# EAGLE board untitled (EAGLE 6.1)
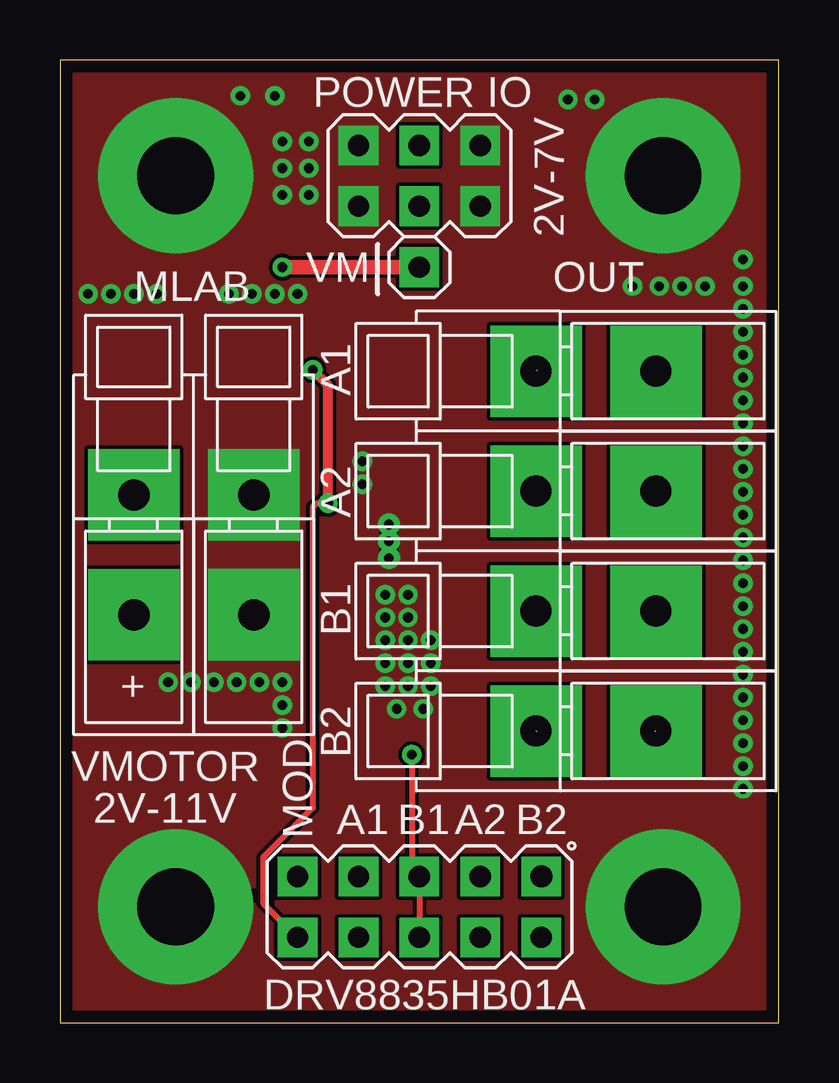
[diagram p0: board, top side]
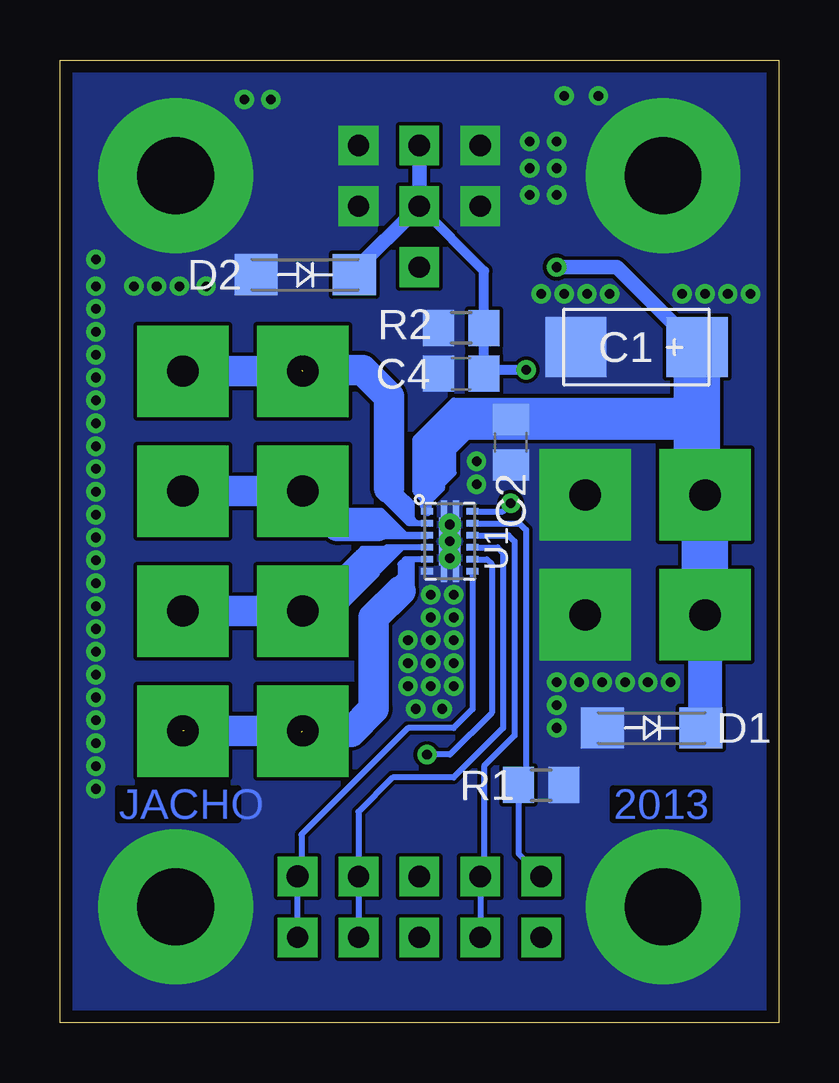
[diagram p1: board, bottom side, seen from below]

Size 29.97 x 40.13 mm. Coordinates in mm from the lower left corner, seen from the top.
Outline: 0,0 29.97,0 29.97,40.13 0,40.13 0,0
Copper layers (1*16): Top 0.035mm / dielectric 1.5mm / Bottom 0.035mm
Design rules: minimum track width 8mil, minimum drill 16mil, track to track 6mil, track to pad 6mil, pad to pad 6mil, via to via 6mil, smd to smd 6mil, copper to edge 20mil, drill to drill 8mil, minimum pad ring 10mil, minimum via ring 8mil, stop-mask expansion 4mil, vias tented up to drill 25mil, thermal gap 0mil

## Footprints (pad centres in the part's own frame; a part is rotated, then mirrored left to right if it is on the bottom)
C = smd 2.55 x 2.5: + 2.525,0; - -2.525,0
C0805 = smd 1.3 x 1.5: 1 -0.95,0; 2 0.95,0
SMA = smd 1.8 x 1.7: A -2.05,0; K 2.05,0
0805 = smd 1.3 x 1.5: 1 -0.95,0; 2 0.95,0
WAGO256 = drill 1.3 pad 3.81 square: 1 2.54,0; A1 -2.46,0
MA05-2 = drill 0.914 pad 1.651 square: 1 -5.08,-1.27 | drill 0.889 pad 1.651 square: 2 -5.08,1.27; 3 -2.54,-1.27; 4 -2.54,1.27; 5 0,-1.27; 6 0,1.27; 7 2.54,-1.27; 8 2.54,1.27; 9 5.08,-1.27; 10 5.08,1.27
MA03-2 = drill 0.889 pad 1.651 square: 1 -2.54,-1.27; 2 -2.54,1.27; 3 0,-1.27; 4 0,1.27; 5 2.54,-1.27; 6 2.54,1.27
MA01-1 = drill 0.889 pad 1.651 square: 1 0,0
WSON = smd 0.28 x 0.5: 1 -1.25,-0.95; 2 -0.75,-0.95; 3 -0.25,-0.95; 4 0.25,-0.95; 5 0.75,-0.95; 6 1.25,-0.95; 7 1.25,0.95; 8 0.75,0.95; 9 0.25,0.95; 10 -0.25,0.95; 11 -0.75,0.95; 12 -1.25,0.95 | smd 0.7 x 0.25: P1 -1.35,0.25; P2 -1.35,-0.25; P7 1.35,0.25; P8 1.35,-0.25 | smd 2 x 0.9: P3 0,0 | drill 0.4 pad 0.5: P4 -0.7,0; P5 0,0; P6 0.7,0
SROUB3M = drill 3.2 pad 6.452: P$1 0,0

## Placement (x,y rotation side)
C1  47uF/16V  [C]  5.94,28.16 0 bottom
C2  100nF  [C0805]  11.18,24.19 270 bottom
C4  100nF  [C0805]  13.24,27.05 180 bottom
D1  M4  [SMA]  5.3,12.29 0 bottom
D2  M4  [SMA]  19.75,31.18 0 bottom
R1  22k  [0805]  9.91,9.91 180 bottom
R2  22k  [0805]  13.24,28.96 0 bottom
SV1  [WAGO256]  3.08,19.46 90 top
SV2  [WAGO256]  8.08,19.46 90 top
SV3  [WAGO256]  22.39,12.16 180 top
SV4  [WAGO256]  22.39,17.16 180 top
SV5  [MA05-2]  14.99,4.83 180 top
SV7  [WAGO256]  22.39,22.16 180 top
SV8  [WAGO256]  22.39,27.16 180 top
SV9  [MA03-2]  14.99,35.31 0 top
SV10  [MA01-1]  14.99,31.5 0 top
U1  BRV8835  [WSON]  13.72,20.07 270 bottom
X1  SROUB3M  [SROUB3M]  4.83,4.83 0 top
X2  SROUB3M  [SROUB3M]  25.15,4.83 0 top
X3  SROUB3M  [SROUB3M]  25.15,35.31 0 top
X4  SROUB3M  [SROUB3M]  4.83,35.31 0 top

## Library data of the parts
C1 C2 C4 = moje_C
D1 D2 X1-X4 = moje
R1 R2 = moje_R
SV1-SV4 SV7 SV8 = moje_konektory
SV5 SV10 = moje_hrebinky
SV9 = moje_hrebinky; OC_FARNELL: unknown; OC_NEWARK: unknown
U1 = moje_io

## Nets
+VCC: C4.1 D2.K R2.2 SV5.10 SV9.3 SV9.4 U1.12
GND: C1.- C2.2 C4.2 D1.A D2.A R1.1 R2.1 SV2.1 SV2.A1 SV9.1 SV9.2 SV9.5 SV9.6 U1.6 U1.P1 U1.P2 U1.P3 U1.P4 U1.P5 U1.P6 U1.P7 U1.P8 X1.P$1 X2.P$1 X3.P$1 X4.P$1
N$1: SV3.1 SV3.A1 U1.5
N$2: SV5.5 SV5.6 U1.8
N$3: SV4.1 SV4.A1 U1.4
N$4: SV7.1 SV7.A1 U1.3
N$5: SV8.1 SV8.A1 U1.2
N$8: SV5.1 SV5.2 U1.7
N$9: R1.2 SV5.9 U1.11
N$11: SV5.3 SV5.4 U1.9
N$13: SV5.7 SV5.8 U1.10
VN: C1.+ C2.1 D1.K SV1.1 SV1.A1 SV10.1 U1.1

## Tracks (layer width: path | path; a pad name or v marks a point on that pad's centre or on a via)
+VCC  (via drill 0.4)
  Top 0.254: SV5.10 8.48,4.98 8.48,6.89 10.54,8.95 10.54,21.49 10.7,21.65 v11.18,21.65
  Top 0.406: v11.18,21.65 11.18,26.57 v10.54,27.21
  Bottom 0.254: U1.12 11.51,21.32 v11.18,21.65
  Bottom 0.406: v10.54,27.21 12.13,27.21 C4.1 R2.2 12.29,31.34 SV9.3
  Bottom 0.61: 17.76,31.26 SV9.3 SV9.4 | 17.76,31.26 17.84,31.18 | D2.K 17.7,31.19 17.76,31.26
GND  (via drill 0.4)
  other vias: 10.38,36.73 9.27,36.73 10.38,35.62 9.27,35.62 9.27,34.51 10.38,34.51 8.95,38.64 7.05,30.38 8,30.38 8.95,30.38 6.41,14.19 7.37,14.19 8.32,14.19 13.56,14.03 14.51,14.03 14.51,14.99 13.56,14.99 13.56,15.94 14.51,15.94 14.03,13.08 13.56,16.89 14.51,16.89 12.6,22.45 13.56,17.84 14.51,17.84 12.6,23.4 28.48,12.6 28.48,13.56 28.48,14.51 28.48,15.46 28.48,16.41 28.48,17.37 28.48,18.32 28.48,19.27 28.48,20.22 28.48,21.18 28.48,22.13 28.48,23.08 28.48,24.03 28.48,24.99 28.48,25.94 28.48,26.89 28.48,27.84 28.48,28.8 28.48,29.75 28.48,30.7 28.48,31.81 7.52,38.64 23.88,30.7 21.18,38.48 22.29,38.48 9.91,30.38 4.03,30.38 3.08,30.38 2.13,30.38 1.17,30.38 28.48,11.65 28.48,10.7 28.48,9.75 15.14,13.08 15.46,14.03 15.46,14.99 15.46,15.94 24.99,30.7 25.94,30.7 26.89,30.7 4.51,14.19 5.46,14.19 9.27,14.19 9.27,13.24 9.27,12.29
  pour Bottom: 0.06,40.07 -0.25,40.07 -0.25,-0.25 40.39,-0.25 40.39,40.39 0.06,40.39
  pour Top: -0.57,40.7 40.7,40.7 40.7,-0.25 -0.89,-0.25 -0.89,40.7
N$1  (2 unrouted)
  Bottom 0.254: U1.5 15.58,19.32 15.7,19.19 | 15.7,19.19 15.78,19.11 15.78,18.64 16.1,18.32 | 15.62,17.94 15.62,18 | 15.62,18 15.62,19.11 15.7,19.19 | 15.62,18 15.3,18 15.3,19.27 15.46,19.27 15.46,18.32 15.78,18
  Bottom 0.813: 15.62,18 15.68,17.88 15.62,17.94
  Bottom 1.27: SV3.1 24.8,12.16 24.83,12.13 | 19.91,12.13 17.84,12.13 16.89,13.08 16.89,16.89 15.78,18
N$2  (via drill 0.4)
  Top 0.254: v14.67,11.18 14.67,6.41 SV5.5 SV5.6
  Bottom 0.254: U1.8 12.17,19.32 11.97,19.11 11.97,12.92 13.72,11.18 v14.67,11.18
N$3
  Bottom 0.254: 17.21,18.95 17.21,19.11 16.89,19.43 16.73,19.43 16.57,19.59 | 15.71,19.82 17.05,18.48 17.05,18.8 16.1,19.75 17.05,19.75 17.21,19.59 | U1.4 16.35,19.82 16.41,19.75 17.37,19.75 17.53,19.59 | 19.59,17.53 17.68,19.43 17.53,19.59 | 17.21,19.59 16.57,19.59 | 16.41,19.59 16.57,19.59 | 17.21,19.59 17.53,19.59
  Bottom 1.27: SV4.A1 SV4.1 19,17.16 17.21,18.95
N$4
  Bottom 0.254: 18.64,21.34 16.57,21.34 15.62,20.38 15.71,20.38 15.78,20.32
  Bottom 0.305: U1.3 15.78,20.32 16.66,20.32 16.1,20.54
  Bottom 0.61: 16.1,20.54 16.57,20.54 16.73,20.7
  Bottom 1.27: SV7.A1 SV7.1 18.39,20.7 16.73,20.7
N$5  (1 unrouted)
  Bottom 0.254: U1.2 15.42,20.82 16.73,22.13 16.41,22.13 15.3,21.02 | 15.14,20.86 15.3,21.02 | 15.3,21.02 15.3,21.34 | 15.3,21.34 15.94,21.97 | 15.3,21.34 15.3,21.65 15.78,22.13
  Bottom 0.305: 15.94,21.97 16.26,22.29
  Bottom 1.27: SV8.A1 SV8.1 | 16.26,22.29 16.26,26.1 17.37,27.21 19.91,27.21
N$8
  Bottom 0.254: U1.7 12.77,13.08 13.56,12.29 15.46,12.29 19.91,7.84 19.91,6.26 SV5.1 SV5.2
N$9
  Bottom 0.254: SV5.9 10.86,7.05 R1.2 10.54,10.22 10.54,20.54 10.82,20.82 U1.11
N$11
  Bottom 0.254: U1.9 11.72,19.82 11.49,19.59 11.49,12.29 13.56,10.22 16.1,10.22 17.53,8.79 SV5.3 SV5.4
N$13
  Bottom 0.254: SV5.8 SV5.7 12.29,6.26 12.29,10.7 11.02,11.97 11.02,20.07 11.27,20.32 U1.10
VN  (via drill 0.4)
  Top 0.61: SV10.1 v9.27,31.5
  Bottom 0.254: 13.4,24.19 13.56,24.04 13.56,22.92 14.03,22.45 14.03,22.29 14.51,21.81 14.67,21.81 14.67,21.66 14.83,21.49 14.83,21.81 15.14,22.13 15.14,24.35 13.56,25.94 3.4,25.94 3.24,26.1
  Bottom 0.406: U1.1 14.67,21.81 14.67,22.29
  Bottom 0.61: C2.1 13.24,25.14 13.4,24.99 | v9.27,31.5 6.75,31.5 C1.+
  Bottom 1.016: 14.67,22.29 14.67,23.08 14.35,23.24
  Bottom 1.422: SV1.A1 3.08,12.46 D1.K
  Bottom 1.676: 14.35,23.24 14.35,24.04 13.4,24.99 13.24,25.15 3.71,25.15 3.57,25.15 3.41,24.99 | 3.41,22.33 SV1.1
  Bottom 1.93: SV1.A1 3.08,21.97 | 3.08,21.97 SV1.1 | 3.08,21.97 3.41,22.3 C1.+ 3.41,25.45 3.71,25.15

## Text on the board
Bottom: 2013 | JACHO
tPlace: POWER IO | 2V-7V | VM | OUT | MLAB | A1 | A2 | B1 | + | B2 | VMOTOR | 2V-11V | A1 | B1 | A2 | B2 | MOD | DRV8835HB01A